# EAGLE board EncoderInterface (EAGLE 6.4)
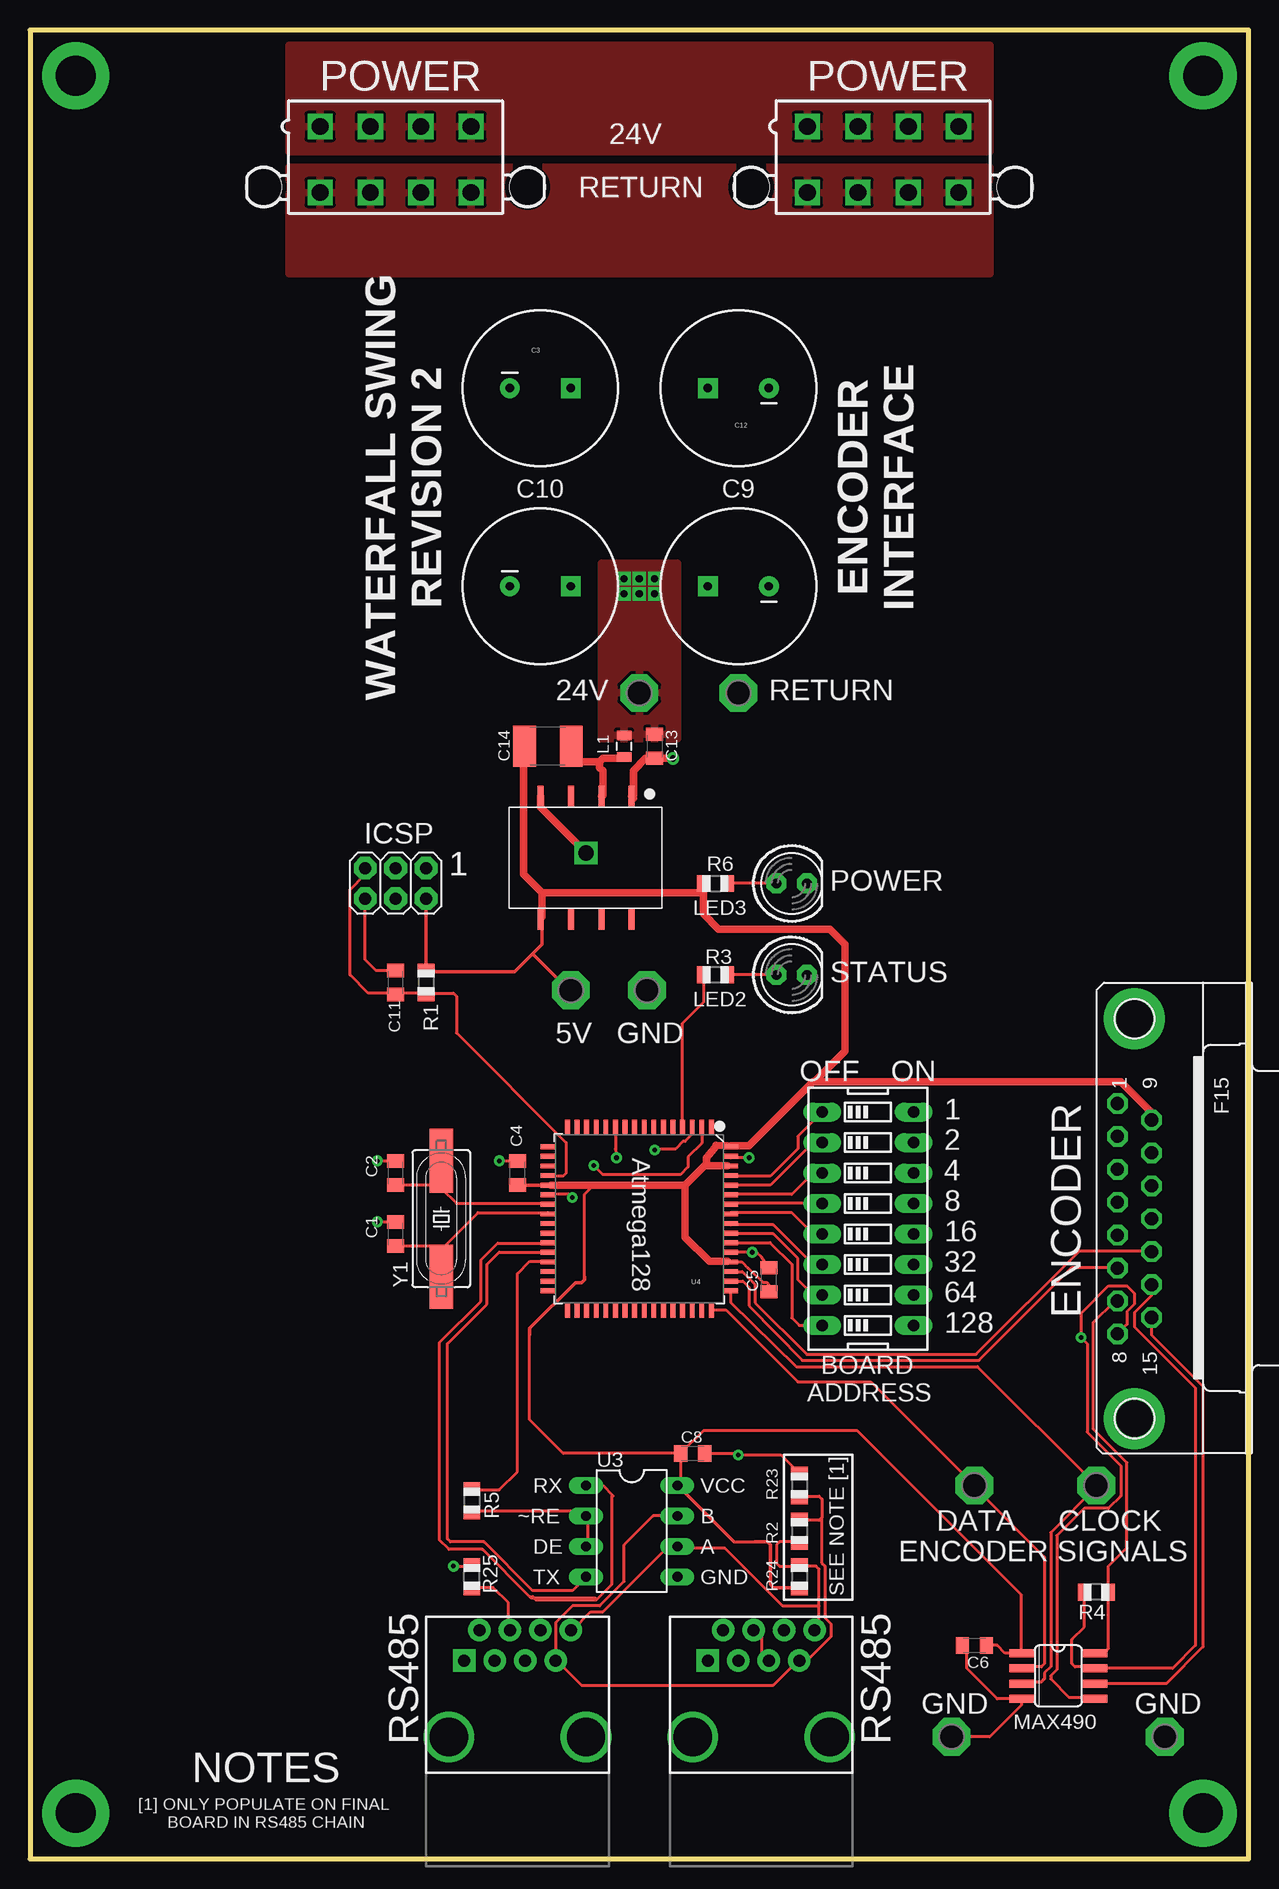
[diagram p0: board, top side]
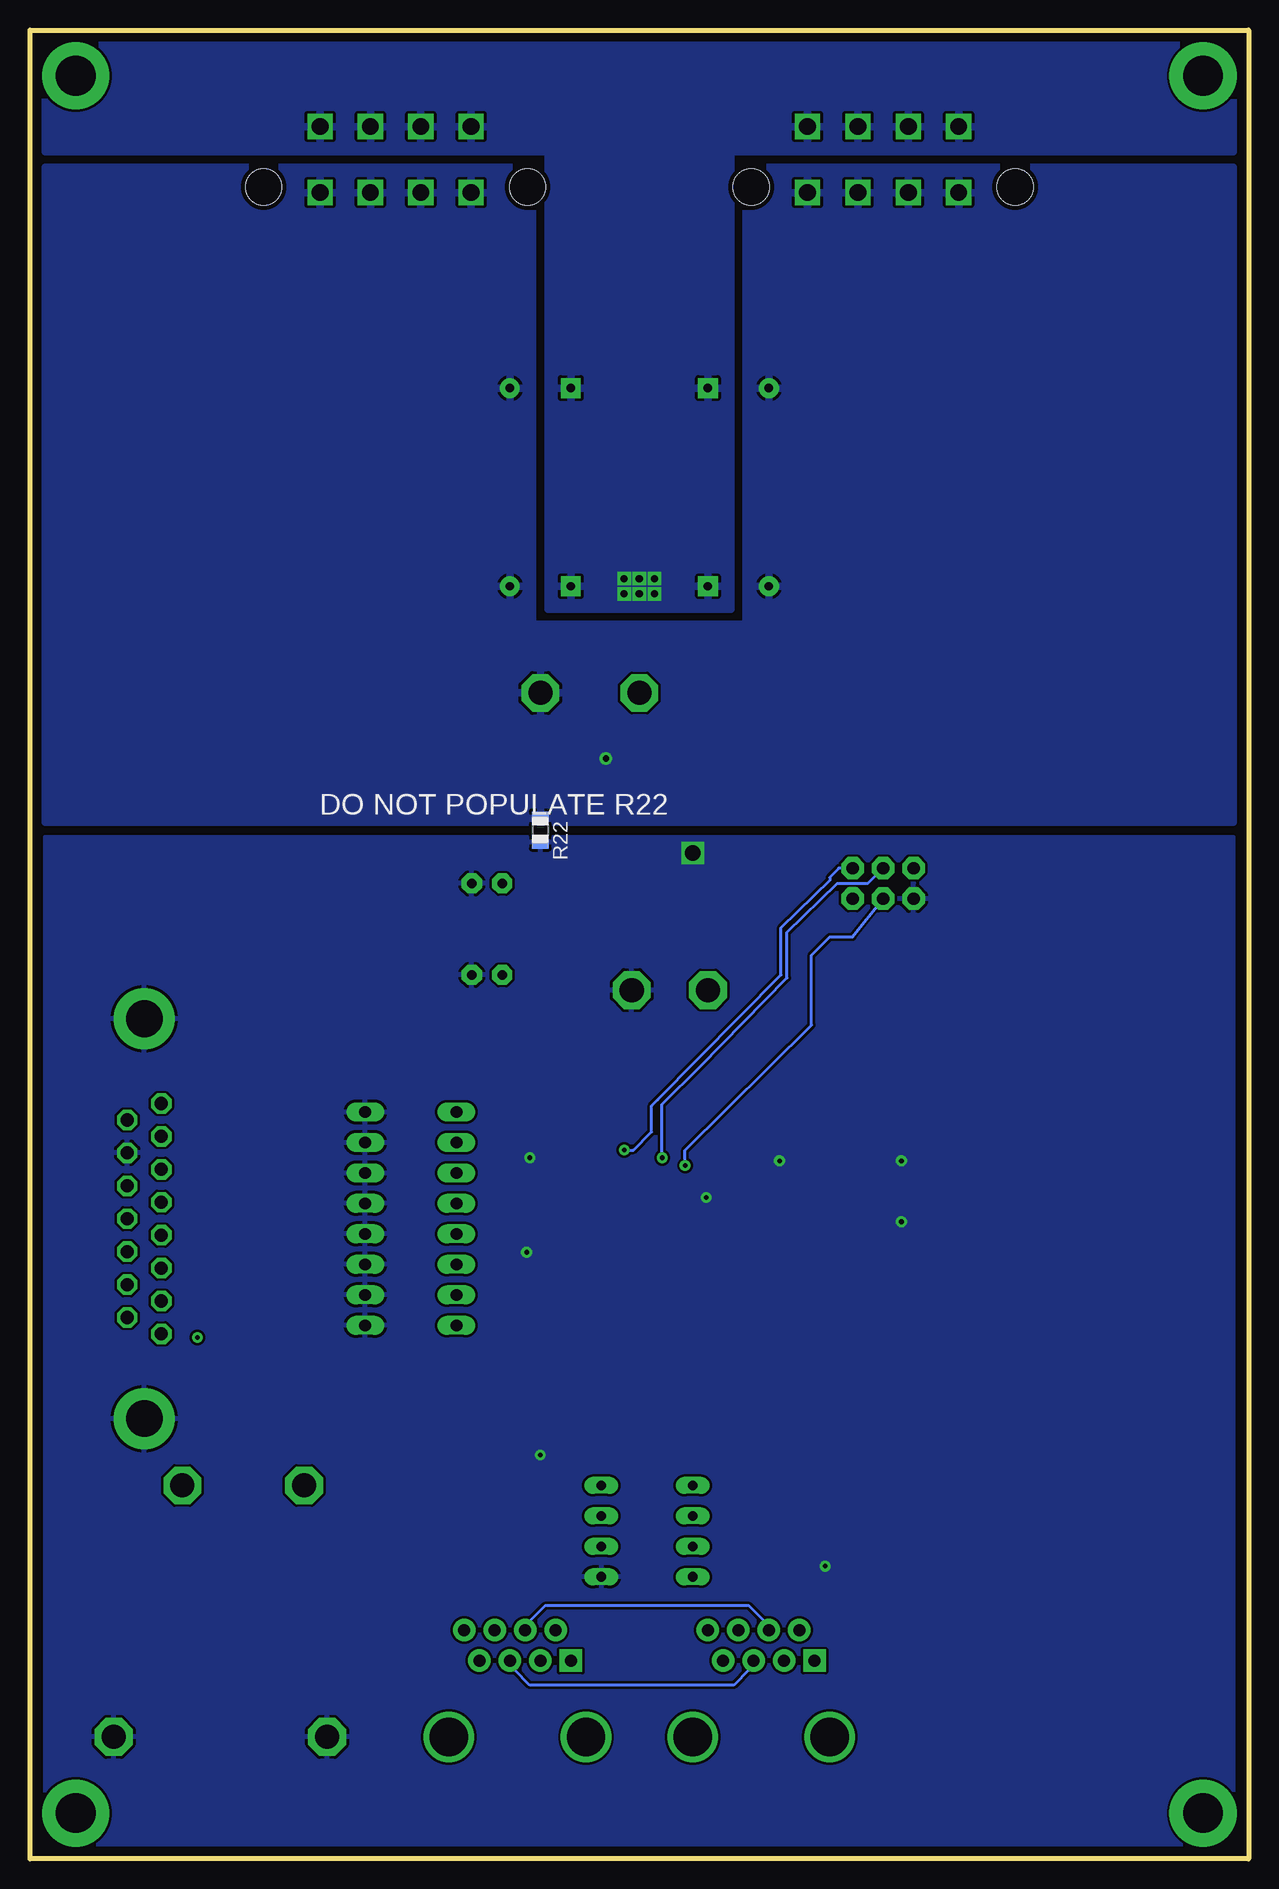
[diagram p1: board, bottom side, seen from below]

Size 101.6 x 152.4 mm. Coordinates in mm from the lower left corner, seen from the top.
Outline: 0,0 101.6,0 101.6,152.4 0,152.4 0,0
Copper layers (1*16): Top 0.035mm / dielectric 1.5mm / Bottom 0.035mm
Design rules "icc-4pcb": minimum track width 10mil, minimum drill 15mil, track to track 8mil, track to pad 8mil, pad to pad 8mil, via to via 8mil, smd to smd 8mil, copper to edge 15mil, drill to drill 8mil, minimum pad ring 12mil, minimum via ring 10mil, stop-mask expansion 4mil, vias tented up to drill 0mil, thermal gap 10mil
Net classes: 0 default: width 0.203 mm; 1 Power: width 0.305 mm

## Footprints (pad centres in the part's own frame; a part is rotated, then mirrored left to right if it is on the bottom)
C0805K = smd 1.1 x 1.4: 1 -1,0; 2 1,0
CPOL-RADIAL-1000UF-35V = drill 0.7 pad 1.651 square: 1 2.54,0 | drill 0.7 pad 1.651: 2 -2.54,0
C1812 = smd 1.9 x 3.4: 1 -1.95,0; 2 1.95,0
SO08 = smd 0.66 x 2.032: 1 -1.905,-3.073; 2 -0.635,-3.073; 3 0.635,-3.073; 4 1.905,-3.073; 5 1.905,3.073; 6 0.635,3.073; 7 -0.635,3.073; 8 -1.905,3.073
2X03 = drill 1.016 pad 1.88 octagon: 1 -2.54,-1.27; 2 -2.54,1.27; 3 0,-1.27; 4 0,1.27; 5 2.54,-1.27; 6 2.54,1.27
RJ45-8 = drill 1 pad 1.88 square: 1 -4.445,6.35 | drill 1 pad 1.88: 2 -3.175,8.89; 3 -1.905,6.35; 4 -0.635,8.89; 5 0.635,6.35; 6 1.905,8.89; 7 3.175,6.35; 8 4.445,8.89 | drill 3.2 pad 3.556: P$2 -5.715,0; P$3 5.715,0
STAND-OFF = drill 3.302 pad 5.588: P$1 0,0
0805 = smd 0.8 x 1.2: 1 -0.9,0; 2 0.9,0
LED5MM = drill 0.813 pad 1.676 octagon: A -1.27,0; K 1.27,0
R0805 = smd 1.1 x 1.4: 1 -1,0; 2 1,0
RECOM-SMD-8 = smd 0.5 x 1.8: PIN1 2.54,-0.9; PIN2 5.08,-0.9; PIN3 7.62,-0.9; PIN4 10.16,-0.9; PIN5 10.16,9.3; PIN6 7.62,9.3; PIN7 5.08,9.3; PIN8 2.54,9.3
DIPSWITCH-08 = drill 0.97 long: 1 -8.89,-3.81; 2 -6.35,-3.81; 3 -3.81,-3.81; 4 -1.27,-3.81; 5 1.27,-3.81; 6 3.81,-3.81; 7 6.35,-3.81; 8 8.89,-3.81; 9 8.89,3.81; 10 6.35,3.81; 11 3.81,3.81; 12 1.27,3.81; 13 -1.27,3.81; 14 -3.81,3.81; 15 -6.35,3.81; 16 -8.89,3.81
P1-20 = drill 2.007 pad 3.15 octagon: TP 0,0
DIL08 = drill 0.813 long: 1 -3.81,-3.81; 2 -1.27,-3.81; 3 1.27,-3.81; 4 3.81,-3.81; 5 3.81,3.81; 6 1.27,3.81; 7 -1.27,3.81; 8 -3.81,3.81
TQFP64_14X14MM = smd 0.4 x 1.27: 1 -6,-7.6; 2 -5.2,-7.6; 3 -4.4,-7.6; 4 -3.6,-7.6; 5 -2.8,-7.6; 6 -2,-7.6; 7 -1.2,-7.6; 8 -0.4,-7.6; 9 0.4,-7.6; 10 1.2,-7.6; 11 2,-7.6; 12 2.8,-7.6; 13 3.6,-7.6; 14 4.4,-7.6; 15 5.2,-7.6; 16 6,-7.6; 33 6,7.6; 34 5.2,7.6; 35 4.4,7.6; 36 3.6,7.6; 37 2.8,7.6; 38 2,7.6; 39 1.2,7.6; 40 0.4,7.6; 41 -0.4,7.6; 42 -1.2,7.6; 43 -2,7.6; 44 -2.8,7.6; 45 -3.6,7.6; 46 -4.4,7.6; 47 -5.2,7.6; 48 -6,7.6 | smd 1.27 x 0.4: 17 7.6,-6; 18 7.6,-5.2; 19 7.6,-4.4; 20 7.6,-3.6; 21 7.6,-2.8; 22 7.6,-2; 23 7.6,-1.2; 24 7.6,-0.4; 25 7.6,0.4; 26 7.6,1.2; 27 7.6,2; 28 7.6,2.8; 29 7.6,3.6; 30 7.6,4.4; 31 7.6,5.2; 32 7.6,6; 49 -7.6,6; 50 -7.6,5.2; 51 -7.6,4.4; 52 -7.6,3.6; 53 -7.6,2.8; 54 -7.6,2; 55 -7.6,1.2; 56 -7.6,0.4; 57 -7.6,-0.4; 58 -7.6,-1.2; 59 -7.6,-2; 60 -7.6,-2.8; 61 -7.6,-3.6; 62 -7.6,-4.4; 63 -7.6,-5.2; 64 -7.6,-6
F15HP = drill 1.092 octagon: 1 -9.601,-1.422; 2 -6.858,-1.422; 3 -4.115,-1.422; 4 -1.372,-1.422; 5 1.372,-1.422; 6 4.115,-1.422; 7 6.858,-1.422; 8 9.601,-1.422; 9 -8.23,1.422; 10 -5.486,1.422; 11 -2.743,1.422; 12 0,1.422; 13 2.743,1.422; 14 5.486,1.422; 15 8.23,1.422 | drill 3.048 pad 5.08: G1 -16.662,0; G2 16.662,0
5566-8 = drill 1.4 square: 1 6.3,-2.75; 2 2.1,-2.75; 3 -2.1,-2.75; 4 -6.3,-2.75; 5 6.3,2.75; 6 2.1,2.75; 7 -2.1,2.75; 8 -6.3,2.75 | hole 3: 11,2.29; -11,2.29
HC49UP = smd 5.334 x 1.93: 1 -4.826,0; 2 4.826,0

## Placement (x,y rotation side)
C1  31p  [C0805K]  30.48,52.07 90 top
C2  31p  [C0805K]  30.48,57.15 90 top
C3  1000u  [CPOL-RADIAL-1000UF-35V]  42.55,122.56 0 top
C4  .1u  [C0805K]  40.64,57.15 90 top
C5  .1u  [C0805K]  61.59,48.26 90 top
C6  .1u  [C0805K]  78.74,17.78 180 top
C8  .1u  [C0805K]  55.24,33.78 0 top
C9  1000u  [CPOL-RADIAL-1000UF-35V]  59.05,106.05 180 top
C10  1000u  [CPOL-RADIAL-1000UF-35V]  42.55,106.05 0 top
C11  .1u  [C0805K]  30.48,73.03 90 top
C12  1000u  [CPOL-RADIAL-1000UF-35V]  59.05,122.56 180 top
C13  4.7uF  [C0805K]  52.07,92.71 270 top
C14  470pF,3kV  [C1812]  43.18,92.71 180 top
IC1  MAX490  [SO08]  85.72,15.24 270 top
ICSP  [2X03]  30.48,81.28 180 top
J1  RJ45-8PTH  [RJ45-8]  40.64,10.16 0 top
J2  RJ45-8PTH  [RJ45-8]  60.96,10.16 0 top
JP1  STAND-OFF  [STAND-OFF]  97.79,3.81 0 top
JP2  STAND-OFF  [STAND-OFF]  3.81,3.81 0 top
JP3  STAND-OFF  [STAND-OFF]  97.79,148.59 0 top
JP4  STAND-OFF  [STAND-OFF]  3.81,148.59 0 top
L1  22uH  [0805]  49.53,92.71 90 top
LED2  [LED5MM]  63.5,73.66 0 top
LED3  [LED5MM]  63.5,81.28 0 top
R1  10k  [R0805]  33.02,73.03 270 top
R2  120  [R0805]  64.14,27.3 270 top
R3  1k  [R0805]  57.15,73.66 180 top
R4  120  [R0805]  88.9,22.23 180 top
R5  1k  [R0805]  36.83,29.84 270 top
R6  1k  [R0805]  57.15,81.28 0 top
R22  0  [R0805]  59.05,85.72 270 bottom
R23  560  [R0805]  64.14,31.11 270 top
R24  560  [R0805]  64.14,23.5 270 top
R25  0  [R0805]  36.83,23.5 90 top
REG  RECOM-R2S-2405-R  [RECOM-SMD-8]  52.7,87.63 180 top
SW1  [DIPSWITCH-08]  69.85,53.34 270 top
TP1  PTR1PAD1-20  [P1-20]  50.8,97.16 0 top
TP2  PTR1PAD1-20  [P1-20]  59.05,97.16 0 top
TP3  PTR1PAD1-20  [P1-20]  45.09,72.39 0 top
TP4  PTR1PAD1-20  [P1-20]  51.44,72.39 0 top
TP5  PTR1PAD1-20  [P1-20]  88.9,31.11 0 top
TP6  PTR1PAD1-20  [P1-20]  78.74,31.11 0 top
TP7  PTR1PAD1-20  [P1-20]  76.83,10.16 0 top
TP8  PTR1PAD1-20  [P1-20]  94.61,10.16 0 top
U3  SN75176BP  [DIL08]  50.16,27.3 270 top
U4  ATMEGA128-SMD  [TQFP64_14X14MM]  50.8,53.34 180 top
X1  [F15HP]  92.08,53.34 270 top
X3  5566-8  [5566-8]  30.48,141.6 180 top
X4  5566-8  [5566-8]  71.12,141.6 180 top
Y1  16MHz  [HC49UP]  34.29,53.34 90 top

## Library data of the parts
C1 C2 C4-C6 C8 C11 C13 LED2 LED3 R1-R6 R22-R25 = adafruit
C3 C9 C10 C12 J1 J2 JP1-JP4 U3 X1 = custom
C14 = rcl
IC1 = maxim; MF: MAXIM; MPN: MAX488CSA; OC_FARNELL: 3534170; OC_NEWARK: 34C3921
ICSP = SparkFun
L1 = SparkFun-Passives
REG = icc
SW1 = SparkFun-Electromechanical
TP1-TP8 = testpad
U4 = SparkFun-DigitalIC
X3 X4 = con-molex; OC_FARNELL: unknown; OC_NEWARK: unknown
Y1 = crystal

## Nets
5V [Power]: C4.1 C5.1 C6.1 C8.1 C14.2 IC1.1 ICSP.2 R1.1 R6.1 R24.2 REG.PIN5 TP3.TP U3.8 U4.21 U4.52 U4.62 U4.64 X1.9
CLOCK: IC1.3 TP5.TP U4.49
DATA: IC1.2 TP6.TP U4.48
DMINUS: IC1.7 R4.2 X1.14
DPLUS: IC1.8 R4.1 X1.7
GND: C1.2 C2.2 C4.2 C5.2 C6.2 C8.2 C11.2 IC1.4 ICSP.6 LED2.K LED3.K R22.2 R23.1 R25.2 REG.PIN4 SW1.9 SW1.10 SW1.11 SW1.12 SW1.13 SW1.14 SW1.15 SW1.16 TP4.TP TP7.TP TP8.TP U3.5 U4.22 U4.53 U4.63 X1.10 X1.G1 X1.G2
MISO: ICSP.1 U4.3
MOSI: ICSP.4 U4.2
N$1: U3.1 U4.27
N$2: J1.7 J2.7 R2.1 R23.2 U3.7
N$3: R3.2 U4.4
N$4: U3.4 U4.28
N$5: C2.1 U4.23 Y1.2
N$6: C1.1 U4.24 Y1.1
N$8: LED2.A R3.1
N$9: LED3.A R6.2
N$11 [Power]: C14.1 L1.1 REG.PIN2
N$12: R5.2 U3.2 U3.3
N$15: J1.8 J2.8 R2.2 R24.1 U3.6
N$60: J1.4 J1.5 J2.4 J2.5 R25.1
N$61: SW1.1 U4.61
N$62: SW1.2 U4.60
N$63: SW1.3 U4.59
N$64: SW1.4 U4.58
N$65: SW1.5 U4.57
N$66: SW1.6 U4.56
N$67: SW1.7 U4.55
N$68: SW1.8 U4.54
N$70: R5.1 U4.29
NRESET: C11.1 ICSP.5 R1.2 U4.20
RETURN [Power]: C3.2 C9.2 C10.2 C12.2 C13.2 R22.1 REG.PIN1 TP2.TP X3.5 X3.6 X3.7 X3.8 X4.5 X4.6 X4.7 X4.8
SCK: ICSP.3 U4.11
ST: U4.50 X1.6
TMINUS: IC1.6 X1.15
TPLUS: IC1.5 X1.8
V+ [Power]: C3.1 C9.1 C10.1 C12.1 C13.1 L1.2 TP1.TP X3.1 X3.2 X3.3 X3.4 X4.1 X4.2 X4.3 X4.4
VR: U4.51 X1.13

## Tracks (layer width: path | path; a pad name or v marks a point on that pad's centre or on a via)
5V
  Top 0.254: C8.1 54.24,31.39 U3.8 | C8.1 44.45,33.78 41.66,36.58 41.66,43.69 41.66,43.81 | 46.23,48.39 46.23,48.51 46.23,55.37 46.99,56.13 | C8.1 56.15,35.69 68.96,35.69 82.65,22 IC1.1 81.28,17.14 80.64,17.78 C6.1 | U4.52 59.35,49.74 59.87,49.23 59.89,49.23 61.09,48.03 61.42,48.03 61.59,47.85 C5.1 | 58.67,26.42 60.45,26.42
  Top 0.305: 56.13,80.52 56.13,81.28 R6.1 | 42.67,80.26 42.93,80.52 42.67,80.52 | 42.67,78.49 REG.PIN5 42.67,78.23 42.67,76.2 41.91,75.44 | 41.15,92.71 C14.2 | C4.1 40.64,56.13 43.18,56.13 U4.21 43.43,56.13 | 58.17,57.76 U4.62 | 58.17,59.44 U4.64 58.42,59.44 | 58.17,49.78 U4.52 | 93.47,62.23 93.47,61.72 | ICSP.2 R1.1 33.02,73.91 40.39,73.91 41.91,75.44 | 41.91,75.44 44.96,72.39 TP3.TP | 60.45,26.42 61.47,26.42 61.72,26.16 61.72,22.86 61.98,22.61 64.01,22.61 R24.2 | 58.67,26.42 U3.8 | 41.66,43.69 41.66,44.2 45.47,48.01 45.97,48.01 46.23,48.26 46.23,48.51
  Top 0.635: 42.93,80.52 56.13,80.52 56.13,78.74 57.4,77.47 66.67,77.47 67.94,76.2 67.94,67.31 65.41,64.77 | 42.67,78.49 42.67,80.26 | 41.15,92.71 41.15,82.04 42.67,80.52 | 58.17,57.76 56.39,57.76 56.39,57.91 | 56.39,57.91 56.39,58.42 57.07,59.21 57.17,59.46 58.17,59.44 | 54.61,56.13 46.99,56.13 43.43,56.13 | 56.39,57.91 54.61,56.13 | 58.17,49.78 56.64,49.78 54.61,51.82 54.61,56.13 | 93.47,62.23 90.93,64.77 65.41,64.77 | 65.41,64.77 65.28,64.77 59.94,59.44 58.42,59.44 | 93.47,61.72 X1.9
CLOCK
  Top 0.254: U4.49 58.4,46.38 63.88,41.02 78.99,41.02 TP5.TP 88.9,30.99 85.09,27.18 85.09,16 84.58,15.49 84.58,14.99 84.33,14.73 82.8,14.73 IC1.3
DATA
  Top 0.254: U4.48 58.02,45.74 64.01,39.75 70.1,39.75 TP6.TP 78.74,30.99 84.58,25.15 84.58,16.26 84.33,16 82.8,16 IC1.2
DMINUS
  Top 0.254: R4.2 87.88,22.1 87.88,19.3 86.87,18.29 86.87,16.26 87.12,16 88.65,16 IC1.7 95.25,15.88 97.16,17.78 97.16,39.24 92.08,44.32 92.08,45.52 93.5,46.94 X1.14
DPLUS
  Top 0.254: IC1.8 88.9,17.27 89.66,17.27 89.92,17.53 89.92,22.1 R4.1 89.92,22.35 89.92,24.38 91.44,25.91 91.44,33.02 88.65,35.81 88.65,44.7 90.42,46.48 X1.7
GND  (via drill 0.38, 1.27)
  Top 0.254: v45.21,55.12 44.96,55.37 43.43,55.37 U4.22 | U4.53 58.42,50.55 v60.2,50.55 60.58,50.55 60.96,50.16 C5.2 | v59.94,58.42 58.42,58.42 U4.63 | v35.31,24.38 36.83,24.38 R25.2 | v28.96,53.09 30.48,53.09 C1.2 | v28.96,58.17 30.48,58.17 C2.2 | v39.12,58.17 40.64,58.17 C4.2 | 64.01,32 R23.1 62.59,33.66 v59.05,33.66 58.93,33.78 C8.2 | TP7.TP 80.01,10.16 82.65,12.8 IC1.4 80.64,13.34 78.11,15.88 78.11,17.41 C6.2 | C11.2 28.84,74.03 27.94,74.93 ICSP.6
  Top 0.635: REG.PIN4 42.55,87.63 v46.35,83.82
  pour Bottom: 1.27,1.27 1.27,85.09 100.33,85.09 100.33,1.27
MISO  (via drill 0.38)
  Top 0.254: U4.3 55.12,60.96 55.12,60.3 54.61,59.79 54.46,59.79 53.85,59.18 52.07,59.18 v52.07,59.05
  Bottom 0.254: v52.07,59.05 51.31,59.05 49.78,60.58 49.78,62.74 49.28,63.25 38.99,73.66 38.99,77.6 34.92,81.53 34.92,81.79 34.16,82.55 ICSP.1
MOSI  (via drill 0.38)
  Top 0.254: v46.99,57.78 47.75,57.02 54.23,57.02 54.86,57.66 54.86,58.5 56,59.63 U4.2
  Bottom 0.254: v46.99,57.78 46.99,59.05 36.45,69.47 36.45,75.31 34.92,76.83 33.02,76.83 ICSP.4
N$1
  Top 0.254: U3.1 47.75,31.11 48.58,30.29 | 48.58,30.29 48.64,30.23 | 47.12,21.72 41.78,21.72 41.66,21.84 | 41.66,21.84 37.72,25.78 34.92,25.78 34.16,26.54 34.16,43.05 37.59,46.48 37.59,49.91 38.99,51.31 43.17,51.31 U4.27 | 41.66,21.84 41.91,21.84 42.16,21.59 47.24,21.59 48.51,22.86 48.51,30.23 48.58,30.29
N$2
  Top 0.254: 66.04,28.45 65.79,28.19 64.26,28.19 R2.1 | 66.04,28.45 66.04,29.97 65.79,30.23 64.26,30.23 R23.2 | U3.7 51.94,28.57 49.53,26.16 49.53,23.11 47.5,21.08 45.21,21.08 43.81,19.68 J1.7 43.94,16.51 45.97,14.48 61.98,14.48 64.01,16.51 J2.7 64.77,16.51 66.8,18.54 66.8,19.56 66.29,20.07 66.29,24.38 66.04,24.64 66.04,28.45
N$3
  Top 0.254: U4.4 54.36,60.96 54.36,69.6 56.13,71.37 56.13,73.66 R3.2
N$4
  Top 0.254: U3.4 45.21,22.35 41.91,22.35 37.85,26.42 35.05,26.42 34.8,26.67 34.8,42.93 38.1,46.23 38.1,49.53 39.12,50.55 43.18,50.55 U4.28
N$5
  Top 0.254: 34.29,56.13 34.29,55.88 35.56,54.61 43.18,54.61 U4.23 | 34.29,56.13 30.48,56.13 C2.1 | 34.29,56.13 Y1.2
N$6
  Top 0.254: 34.54,51.05 34.29,50.8 Y1.1 34.54,51.05 | 34.54,51.05 37.34,53.85 43.18,53.85 U4.24 | 34.54,51.05 30.48,51.05 C1.1
N$8
  Top 0.254: LED2.A R3.1
N$9
  Top 0.254: LED3.A R6.2
N$11
  Top 0.635: 47.5,91.44 47.75,91.69 49.53,91.69 L1.1 | 47.5,91.44 47.5,90.93 47.75,90.68 47.75,88.65 REG.PIN2 | 47.5,91.44 45.47,91.44 45.21,91.69 45.21,92.71 C14.1
N$12
  Top 0.254: R5.2 36.83,28.96 45.97,28.96 U3.2 46.48,28.45 46.48,26.16 U3.3
N$15
  Top 0.254: R2.2 64.01,26.42 62.48,26.42 62.23,26.16 62.23,24.64 62.48,24.38 64.01,24.38 R24.1 64.26,24.38 65.53,24.38 65.79,24.13 65.79,21.08 | 65.79,21.08 65.79,19.3 65.53,19.05 J2.8 | 52.83,25.91 53.09,25.91 | 53.09,25.91 53.85,25.91 U3.6 | J1.8 45.21,19.05 46.74,20.57 47.75,20.57 53.09,25.91 | 65.79,21.08 62.74,21.08 57.91,25.91 54.1,25.91 U3.6 | 53.09,25.91 U3.6
N$60
  Top 0.254: J2.5 61.47,16.51 60.96,17.02 60.96,18.54 60.45,19.05 J2.4 | R25.1 36.83,22.61 38.61,22.61 39.88,21.34 39.88,19.05 J1.4
  Bottom 0.254: J1.5 41.66,16.51 41.66,15.75 42.93,14.48 59.94,14.48 61.21,15.75 61.47,15.75 61.47,16.51 J2.5 | J1.4 40.39,19.05 40.39,19.81 41.66,21.08 58.67,21.08 59.94,19.81 60.2,19.81 60.2,19.05 J2.4
N$61
  Top 0.254: SW1.1 64.01,60.2 64.01,59.18 61.72,56.9 58.42,56.9 U4.61
N$62
  Top 0.254: SW1.2 65.28,59.69 61.72,56.13 58.42,56.13 U4.60
N$63
  Top 0.254: SW1.3 65.28,57.15 63.5,55.37 58.42,55.37 U4.59
N$64
  Top 0.254: SW1.4 58.42,54.61 U4.58
N$65
  Top 0.254: SW1.5 65.28,52.07 63.5,53.85 58.42,53.85 U4.57
N$66
  Top 0.254: SW1.6 65.28,49.53 61.98,52.83 58.42,52.83 U4.56
N$67
  Top 0.254: SW1.7 65.28,46.99 64.01,48.26 64.01,50.04 61.98,52.07 58.42,52.07 U4.55
N$68
  Top 0.254: U4.54 61.69,51.34 63.5,49.53 63.5,45.09 64.14,44.45 SW1.8
N$70
  Top 0.254: U4.29 43.18,49.78 41.66,49.78 40.64,48.77 40.64,32.26 39.12,30.73 36.83,30.73 R5.1
NRESET
  Top 0.254: 33.02,72.14 35.31,72.14 35.56,71.88 35.56,68.83 44.7,59.69 44.7,57.15 44.45,56.9 43.43,56.9 U4.20 | 33.02,72.14 30.48,72.14 | 33.02,72.14 R1.2 | ICSP.5 27.94,82.04 26.67,80.77 26.67,73.66 28.19,72.14 30.48,72.14 | 30.48,72.14 C11.1
RETURN  (via drill 0.51)
  Top 0.635: 50.29,88.39 REG.PIN1 50.29,88.65 50.29,90.68 51.31,91.69 52.07,91.69 C13.2 52.32,91.69 v53.59,91.69
  pour Bottom: 1.27,86.36 1.27,140.97 41.91,140.97 41.91,102.87 59.69,102.87 59.69,140.97 100.33,140.97 100.33,86.36
  pour Top: 21.59,140.97 21.59,132.08 80.01,132.08 80.01,140.97
SCK  (via drill 0.38)
  Top 0.254: U4.11 48.8,59.15 v48.9,58.42
  Bottom 0.254: v48.9,58.42 48.9,62.87 45.72,66.04 38.48,73.41 38.48,77.22 34.29,81.28 31.75,81.28 ICSP.3
ST
  Top 0.254: U4.50 59.43,48.14 59.94,47.62 59.94,46.1 64.39,41.53 79.12,41.53 86.87,49.28 90.6,49.28 X1.6
TMINUS
  Top 0.254: X1.15 93.5,43.66 97.79,39.37 97.79,17.65 94.74,14.61 IC1.6
TPLUS  (via drill 0.38)
  Top 0.254: IC1.5 88.65,13.46 86.61,13.46 85.09,14.99 85.09,15.24 85.6,15.75 85.6,26.92 87.88,29.21 89.92,29.21 90.93,30.23 90.93,32.77 88.14,35.56 88.14,42.93 v87.63,43.43 87.63,45.47 89.92,47.75 91.44,47.75 92.08,47.12 92.08,46.23 91.44,45.59 91.44,44.53 X1.8
  Bottom 0.254: 87.88,43.69 v87.63,43.43
V+  (via drill 0.6)
  other vias: 49.53,106.68 50.8,106.68 52.07,106.68 49.53,105.41 50.8,105.41 52.07,105.41
  pour Bottom: 1.27,151.13 100.33,151.13 100.33,142.24 58.42,142.24 58.42,104.14 43.18,104.14 43.18,142.24 1.27,142.24
  pour Top: 53.98,93.34 53.98,107.95 47.62,107.95 47.62,93.34
  pour Top: 21.59,142.24 21.59,151.13 80.01,151.13 80.01,142.24
VR
  Top 0.254: U4.51 59.39,48.94 60.45,47.88 60.45,46.35 64.77,42.04 78.87,42.04 87.5,50.67 93.42,50.67 X1.13

## Text on the board
tPlace: POWER | POWER | 24V | RETURN | WATERFALL SWING / REVISION 2 | ENCODER / INTERFACE | 24V | RETURN | • | 1 | POWER | STATUS | 5V | GND | OFF | ON | 1 | • | 2 | Atmega128 | 4 | 8 | 16 | 32 | 64 | ENCODER | 128 | BOARD / ADDRESS | RX | VCC | ~RE | B | SEE NOTE [1] | DATA | CLOCK | DE | A | ENCODER SIGNALS | TX | GND | GND | MAX490 | GND | RS485 | RS485 | NOTES | [1] ONLY POPULATE ON FINAL / BOARD IN RS485 CHAIN
bPlace: DO NOT POPULATE R22